# Altium PCB main.PcbDoc
Units mil, origin at the board's own origin, x right, y up, seen from the top; angles counter-clockwise.
Board outline 6000 x 4000 mil, 2 copper layers (Top Layer, Bottom Layer); 101 components, 100 nets, 369 pads, 32 vias.
Unrouted connection lines stored in the file: 248.
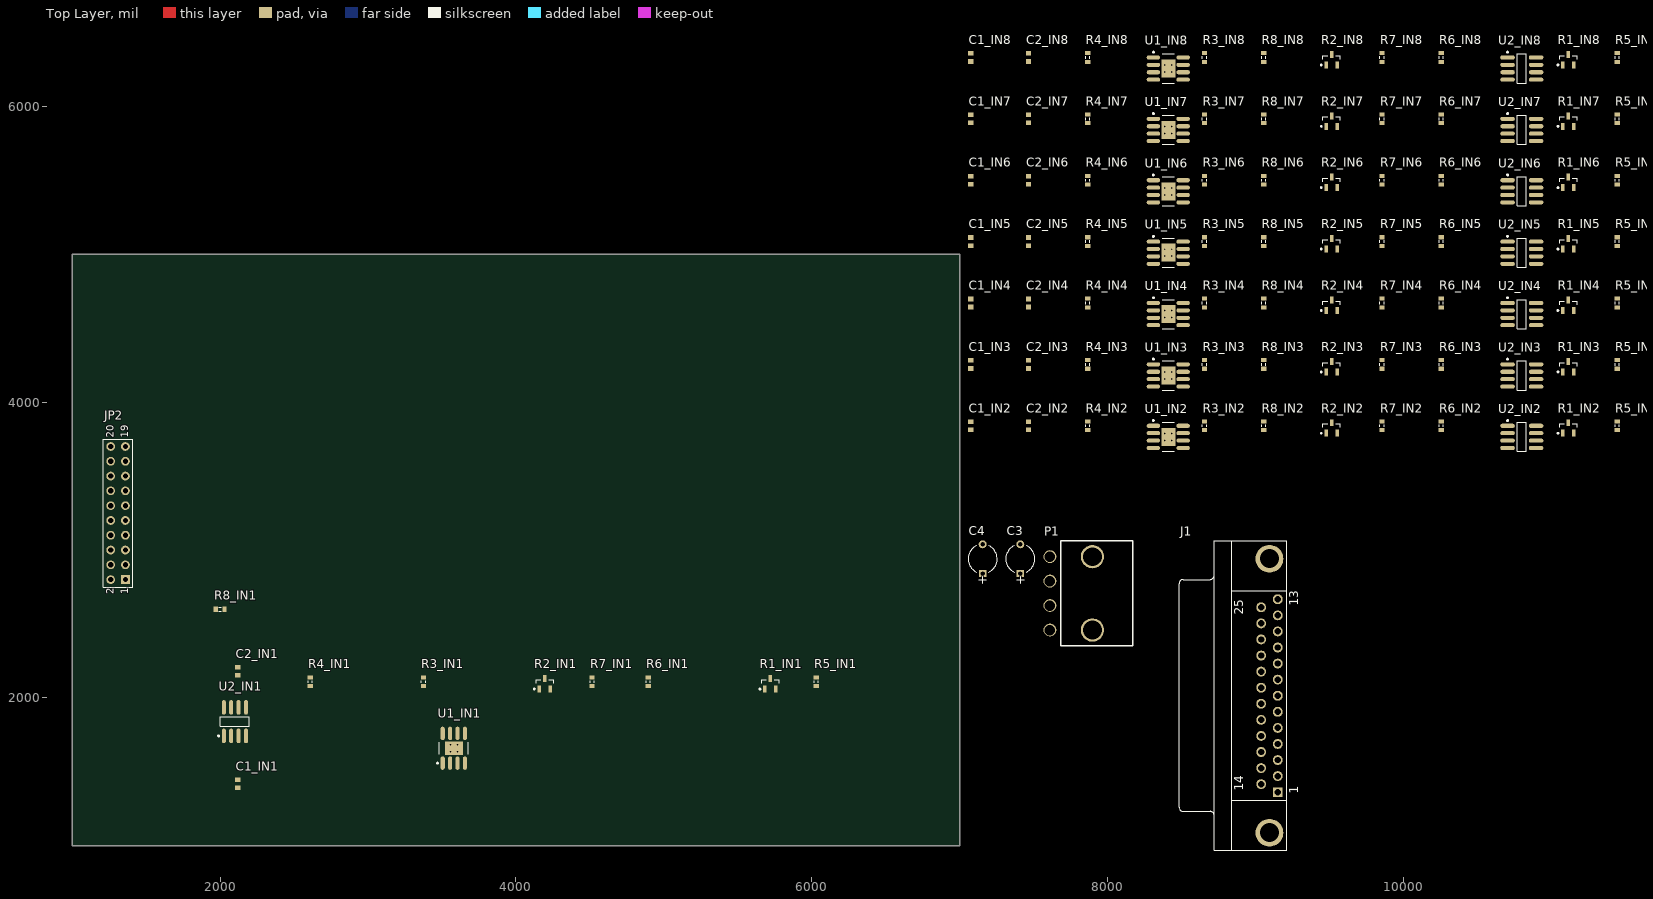
[diagram p0: Top Layer view]
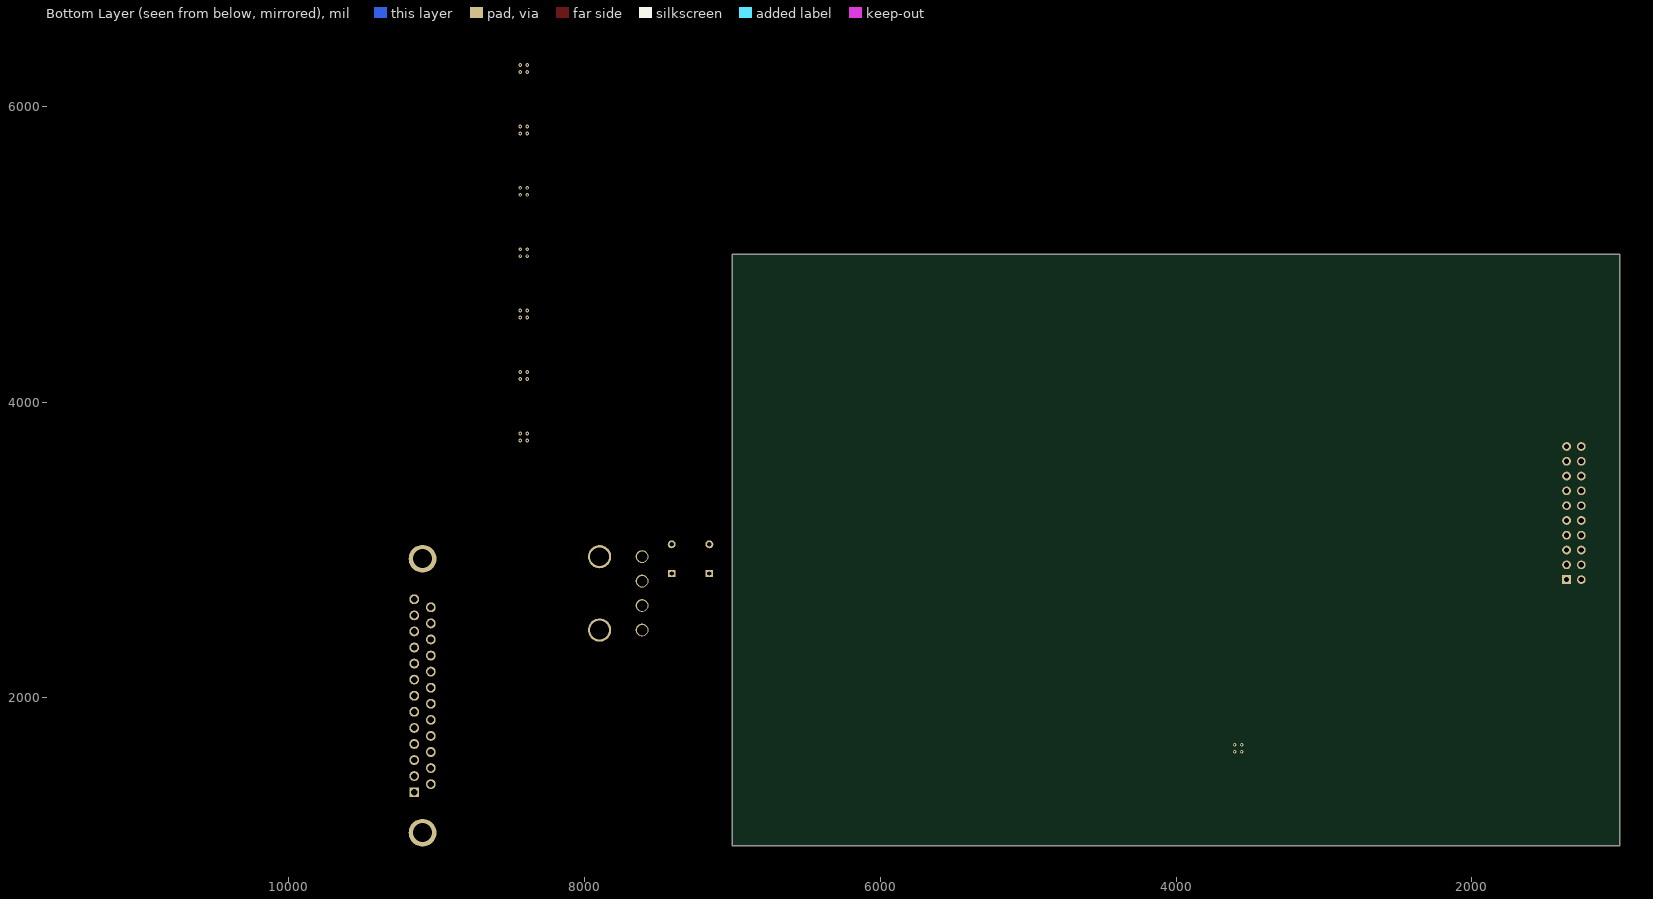
[diagram p1: Bottom Layer view, seen from below]

## Layer stack, top to bottom
Top Layer: signal copper 1.4
Dielectric: dielectric 12.6, FR-4, Dk 4.8
Bottom Layer: signal copper 1.4

## Board outline
1000,1000 7000,1000 7000,5000 1000,5000

## Design rules (kind name [scope] priority, off if disabled: settings)
Clearance [All] p1: gap=10
PolygonConnect [All] p1: connectstyle=Relief reliefconductorwidth=10 reliefentries=4 polygonreliefangle="90 Angle"
RoomDefinition main [InComponentClass('main')] p1: confinementstyle=ConfineIn formatcopy=TRUE lockcomponents=FALSE outline 7045,960 9305,960 9305,3175 7045,3175
RoomDefinition IN8 [InComponentClass('IN8')] p2: confinementstyle=ConfineIn formatcopy=TRUE lockcomponents=FALSE outline 7045,6125 11780,6125 11780,6495 7045,6495
RoomDefinition IN7 [InComponentClass('IN7')] p3: confinementstyle=ConfineIn formatcopy=TRUE lockcomponents=FALSE outline 7045,5710 11780,5710 11780,6080 7045,6080
RoomDefinition IN6 [InComponentClass('IN6')] p4: confinementstyle=ConfineIn formatcopy=TRUE lockcomponents=FALSE outline 7045,5295 11780,5295 11780,5665 7045,5665
RoomDefinition IN5 [InComponentClass('IN5')] p5: confinementstyle=ConfineIn formatcopy=TRUE lockcomponents=FALSE outline 7045,4880 11780,4880 11780,5250 7045,5250
RoomDefinition IN4 [InComponentClass('IN4')] p6: confinementstyle=ConfineIn formatcopy=TRUE lockcomponents=FALSE outline 7045,4465 11780,4465 11780,4835 7045,4835
RoomDefinition IN3 [InComponentClass('IN3')] p7: confinementstyle=ConfineIn formatcopy=TRUE lockcomponents=FALSE outline 7045,4050 11780,4050 11780,4420 7045,4420
RoomDefinition IN2 [InComponentClass('IN2')] p8: confinementstyle=ConfineIn formatcopy=TRUE lockcomponents=FALSE outline 7045,3635 11780,3635 11780,4005 7045,4005
RoomDefinition IN1 [InComponentClass('IN1')] p9: confinementstyle=ConfineIn formatcopy=TRUE lockcomponents=FALSE outline 1830,1540 6345,1540 6345,2275 1830,2275
RoutingVias [All] p1: holewidth=28 width=50 viastyle="Through Hole" minholewidth=28 minwidth=50 maxholewidth=28 maxwidth=50
SilkscreenOverComponentPads [All] p1: minsilkscreentomaskgap=10
SolderMaskExpansion [All] p1: expansion=4
Width [All] p1: maxlimit=10 minlimit=10 preferedwidth=10
27 further rules are at their usual default settings.

## Classes and differential pairs
channel class diff_amp: IN1 IN2 IN3 IN4 IN5 IN6 IN7 IN8
net class OUT-[1..8]: OUT-1 OUT-2 OUT-3 OUT-4 OUT-5 OUT-6 OUT-7 OUT-8
net class OUT+[1..8]: OUT+1 OUT+2 OUT+3 OUT+4 OUT+5 OUT+6 OUT+7 OUT+8
net class IN-[1..8]: IN-1 IN-2 IN-3 IN-4 IN-5 IN-6 IN-7 IN-8
net class IN+[1..8]: IN+1 IN+2 IN+3 IN+4 IN+5 IN+6 IN+7 IN+8
component class main: C3 C4 J1 JP2 P1
component class IN8: C1_IN8 C2_IN8 R1_IN8 R2_IN8 R3_IN8 R4_IN8 R5_IN8 R6_IN8 R7_IN8 R8_IN8 U1_IN8 U2_IN8
component class IN7: C1_IN7 C2_IN7 R1_IN7 R2_IN7 R3_IN7 R4_IN7 R5_IN7 R6_IN7 R7_IN7 R8_IN7 U1_IN7 U2_IN7
component class IN6: C1_IN6 C2_IN6 R1_IN6 R2_IN6 R3_IN6 R4_IN6 R5_IN6 R6_IN6 R7_IN6 R8_IN6 U1_IN6 U2_IN6
component class IN5: C1_IN5 C2_IN5 R1_IN5 R2_IN5 R3_IN5 R4_IN5 R5_IN5 R6_IN5 R7_IN5 R8_IN5 U1_IN5 U2_IN5
component class IN4: C1_IN4 C2_IN4 R1_IN4 R2_IN4 R3_IN4 R4_IN4 R5_IN4 R6_IN4 R7_IN4 R8_IN4 U1_IN4 U2_IN4
component class IN3: C1_IN3 C2_IN3 R1_IN3 R2_IN3 R3_IN3 R4_IN3 R5_IN3 R6_IN3 R7_IN3 R8_IN3 U1_IN3 U2_IN3
component class IN2: C1_IN2 C2_IN2 R1_IN2 R2_IN2 R3_IN2 R4_IN2 R5_IN2 R6_IN2 R7_IN2 R8_IN2 U1_IN2 U2_IN2
component class IN1: C1_IN1 C2_IN1 R1_IN1 R2_IN1 R3_IN1 R4_IN1 R5_IN1 R6_IN1 R7_IN1 R8_IN1 U1_IN1 U2_IN1

## Components (designator, comment, footprint, x,y, rotation, side; value= is the part's Value field where it differs from the comment)
C1_IN1 "Cap Semi" CAPC1608L 2120,1420 r90 top (schematic designator C1)
C1_IN2 "Cap Semi" CAPC1608L 7075,3840 r90 top (schematic designator C1)
C1_IN3 "Cap Semi" CAPC1608L 7075,4255 r90 top (schematic designator C1)
C1_IN4 "Cap Semi" CAPC1608L 7075,4670 r90 top (schematic designator C1)
C1_IN5 "Cap Semi" CAPC1608L 7075,5085 r90 top (schematic designator C1)
C1_IN6 "Cap Semi" CAPC1608L 7075,5500 r90 top (schematic designator C1)
C1_IN7 "Cap Semi" CAPC1608L 7075,5915 r90 top (schematic designator C1)
C1_IN8 "Cap Semi" CAPC1608L 7075,6330 r90 top (schematic designator C1)
C2_IN1 "Cap Semi" CAPC1608L 2120,2180 r90 top (schematic designator C2)
C2_IN2 "Cap Semi" CAPC1608L 7465,3840 r90 top (schematic designator C2)
C2_IN3 "Cap Semi" CAPC1608L 7465,4255 r90 top (schematic designator C2)
C2_IN4 "Cap Semi" CAPC1608L 7465,4670 r90 top (schematic designator C2)
C2_IN5 "Cap Semi" CAPC1608L 7465,5085 r90 top (schematic designator C2)
C2_IN6 "Cap Semi" CAPC1608L 7465,5500 r90 top (schematic designator C2)
C2_IN7 "Cap Semi" CAPC1608L 7465,5915 r90 top (schematic designator C2)
C2_IN8 "Cap Semi" CAPC1608L 7465,6330 r90 top (schematic designator C2)
C3 "Cap Pol1" CAPPR5-5x5 7410,2940 r90 top
C4 "Cap Pol1" CAPPR5-5x5 7155,2940 r90 top
J1 "D Connector 25" DSUB1.385-2H25A 8720,2015 r90 top
JP2 "Header 10X2H" HDR2X10 1360,2800 r90 top
P1 "39-30-3045" MJ4RTHR 7610,2790 r90 top
R1_IN1 "1k / 10k" SOT23-3L 5720,2095 r90 top (schematic designator R1)
R1_IN2 "1k / 10k" SOT23-3L 11115,3825 r90 top (schematic designator R1)
R1_IN3 "1k / 10k" SOT23-3L 11115,4240 r90 top (schematic designator R1)
R1_IN4 "1k / 10k" SOT23-3L 11115,4655 r90 top (schematic designator R1)
R1_IN5 "1k / 10k" SOT23-3L 11115,5070 r90 top (schematic designator R1)
R1_IN6 "1k / 10k" SOT23-3L 11115,5485 r90 top (schematic designator R1)
R1_IN7 "1k / 10k" SOT23-3L 11115,5900 r90 top (schematic designator R1)
R1_IN8 "1k / 10k" SOT23-3L 11115,6315 r90 top (schematic designator R1)
R2_IN1 "1k / 10k" SOT23-3L 4195,2095 r90 top (schematic designator R2)
R2_IN2 "1k / 10k" SOT23-3L 9515,3825 r90 top (schematic designator R2)
R2_IN3 "1k / 10k" SOT23-3L 9515,4240 r90 top (schematic designator R2)
R2_IN4 "1k / 10k" SOT23-3L 9515,4655 r90 top (schematic designator R2)
R2_IN5 "1k / 10k" SOT23-3L 9515,5070 r90 top (schematic designator R2)
R2_IN6 "1k / 10k" SOT23-3L 9515,5485 r90 top (schematic designator R2)
R2_IN7 "1k / 10k" SOT23-3L 9515,5900 r90 top (schematic designator R2)
R2_IN8 "1k / 10k" SOT23-3L 9515,6315 r90 top (schematic designator R2)
R3_IN1 "Res Semi" RESC1608L 3375,2110 r90 top (schematic designator R3)
R3_IN2 "Res Semi" RESC1608L 8655,3840 r90 top (schematic designator R3)
R3_IN3 "Res Semi" RESC1608L 8655,4255 r90 top (schematic designator R3)
R3_IN4 "Res Semi" RESC1608L 8655,4670 r90 top (schematic designator R3)
R3_IN5 "Res Semi" RESC1608L 8655,5085 r90 top (schematic designator R3)
R3_IN6 "Res Semi" RESC1608L 8655,5500 r90 top (schematic designator R3)
R3_IN7 "Res Semi" RESC1608L 8655,5915 r90 top (schematic designator R3)
R3_IN8 "Res Semi" RESC1608L 8655,6330 r90 top (schematic designator R3)
R4_IN1 "Res Semi" RESC1608L 2610,2110 r90 top (schematic designator R4)
R4_IN2 "Res Semi" RESC1608L 7865,3840 r90 top (schematic designator R4)
R4_IN3 "Res Semi" RESC1608L 7865,4255 r90 top (schematic designator R4)
R4_IN4 "Res Semi" RESC1608L 7865,4670 r90 top (schematic designator R4)
R4_IN5 "Res Semi" RESC1608L 7865,5085 r90 top (schematic designator R4)
R4_IN6 "Res Semi" RESC1608L 7865,5500 r90 top (schematic designator R4)
R4_IN7 "Res Semi" RESC1608L 7865,5915 r90 top (schematic designator R4)
R4_IN8 "Res Semi" RESC1608L 7865,6330 r90 top (schematic designator R4)
R5_IN1 "Res Semi" RESC1608L 6030,2110 r90 top (schematic designator R5)
R5_IN2 "Res Semi" RESC1608L 11445,3840 r90 top (schematic designator R5)
R5_IN3 "Res Semi" RESC1608L 11445,4255 r90 top (schematic designator R5)
R5_IN4 "Res Semi" RESC1608L 11445,4670 r90 top (schematic designator R5)
R5_IN5 "Res Semi" RESC1608L 11445,5085 r90 top (schematic designator R5)
R5_IN6 "Res Semi" RESC1608L 11445,5500 r90 top (schematic designator R5)
R5_IN7 "Res Semi" RESC1608L 11445,5915 r90 top (schematic designator R5)
R5_IN8 "Res Semi" RESC1608L 11445,6330 r90 top (schematic designator R5)
R6_IN1 "Res Semi" RESC1608L 4895,2110 r90 top (schematic designator R6)
R6_IN2 "Res Semi" RESC1608L 10255,3840 r90 top (schematic designator R6)
R6_IN3 "Res Semi" RESC1608L 10255,4255 r90 top (schematic designator R6)
R6_IN4 "Res Semi" RESC1608L 10255,4670 r90 top (schematic designator R6)
R6_IN5 "Res Semi" RESC1608L 10255,5085 r90 top (schematic designator R6)
R6_IN6 "Res Semi" RESC1608L 10255,5500 r90 top (schematic designator R6)
R6_IN7 "Res Semi" RESC1608L 10255,5915 r90 top (schematic designator R6)
R6_IN8 "Res Semi" RESC1608L 10255,6330 r90 top (schematic designator R6)
R7_IN1 "Res Semi" RESC1608L 4515,2110 r90 top (schematic designator R7)
R7_IN2 "Res Semi" RESC1608L 9855,3840 r90 top (schematic designator R7)
R7_IN3 "Res Semi" RESC1608L 9855,4255 r90 top (schematic designator R7)
R7_IN4 "Res Semi" RESC1608L 9855,4670 r90 top (schematic designator R7)
R7_IN5 "Res Semi" RESC1608L 9855,5085 r90 top (schematic designator R7)
R7_IN6 "Res Semi" RESC1608L 9855,5500 r90 top (schematic designator R7)
R7_IN7 "Res Semi" RESC1608L 9855,5915 r90 top (schematic designator R7)
R7_IN8 "Res Semi" RESC1608L 9855,6330 r90 top (schematic designator R7)
R8_IN1 "Res Semi" RESC1608L 2000,2600 r180 top (schematic designator R8)
R8_IN2 "Res Semi" RESC1608L 9055,3840 r90 top (schematic designator R8)
R8_IN3 "Res Semi" RESC1608L 9055,4255 r90 top (schematic designator R8)
R8_IN4 "Res Semi" RESC1608L 9055,4670 r90 top (schematic designator R8)
R8_IN5 "Res Semi" RESC1608L 9055,5085 r90 top (schematic designator R8)
R8_IN6 "Res Semi" RESC1608L 9055,5500 r90 top (schematic designator R8)
R8_IN7 "Res Semi" RESC1608L 9055,5915 r90 top (schematic designator R8)
R8_IN8 "Res Semi" RESC1608L 9055,6330 r90 top (schematic designator R8)
U1_IN1 "LME49724MR" MRA08B_M 3580,1660 r90 top (schematic designator U1)
U1_IN2 "LME49724MR" MRA08B_M 8410,3765 r0 top (schematic designator U1)
U1_IN3 "LME49724MR" MRA08B_M 8410,4180 r0 top (schematic designator U1)
U1_IN4 "LME49724MR" MRA08B_M 8410,4595 r0 top (schematic designator U1)
U1_IN5 "LME49724MR" MRA08B_M 8410,5010 r0 top (schematic designator U1)
U1_IN6 "LME49724MR" MRA08B_M 8410,5425 r0 top (schematic designator U1)
U1_IN7 "LME49724MR" MRA08B_M 8410,5840 r0 top (schematic designator U1)
U1_IN8 "LME49724MR" MRA08B_M 8410,6255 r0 top (schematic designator U1)
U2_IN1 "OP284ES" SO-8_M 2100,1840 r90 top (schematic designator U2)
U2_IN2 "OP284ES" SO-8_M 10800,3765 r0 top (schematic designator U2)
U2_IN3 "OP284ES" SO-8_M 10800,4180 r0 top (schematic designator U2)
U2_IN4 "OP284ES" SO-8_M 10800,4595 r0 top (schematic designator U2)
U2_IN5 "OP284ES" SO-8_M 10800,5010 r0 top (schematic designator U2)
U2_IN6 "OP284ES" SO-8_M 10800,5425 r0 top (schematic designator U2)
U2_IN7 "OP284ES" SO-8_M 10800,5840 r0 top (schematic designator U2)
U2_IN8 "OP284ES" SO-8_M 10800,6255 r0 top (schematic designator U2)

## Footprints (in the part's own frame and the unit in brackets; to place one, negate y for a bottom-side part, rotate by r counter-clockwise, add the part's x,y. Pads: shape width x height; smd on the part's side, far side on the other; paste and mask are expansions set on the pad)
CAPC1608L [mm] "Chip Capacitor, Body 1.6x0.8mm, IPC High Density"
  rect 0.8x0.9 smd: 1(-0.7,0) 2(0.7,0)
  body extent -0.87,-0.48 0.87,0.48, height 1.3
CAPPR5-5x5 [mm] "Capacitor, Electrolytic, Radial; Body 5 x 5 mm (Dia.xH typ); Pin Spacing 5 mm (typ)"
  rect 1.25x1.25 hole 0.75: 1(-2.5,0)
  round 1.35 hole 0.8: 2(2.5,0)
  silkscreen extent -2.26,-2.5 2.27,2.5
DSUB1.385-2H25A [mm] "Connector; D Subminiature; 25 Position; Right Angle; Pitch 1.385 mm"
  rect 1.69x1.69 hole 1.09: 1(-16.566,-10.92)
  round 1.69 hole 1.09: 2(-13.805,-10.92) 3(-11.044,-10.92) 4(-8.283,-10.92) 5(-5.522,-10.92) 6(-2.761,-10.92) 7(0,-10.92) 8(2.761,-10.92) 9(5.522,-10.92) 10(8.283,-10.92) 11(11.044,-10.92) 12(13.805,-10.92) 13(16.566,-10.92) 14(-15.185,-8.08) 15(-12.424,-8.08) 16(-9.663,-8.08) 17(-6.902,-8.08) 18(-4.141,-8.08) 19(-1.38,-8.08) 20(1.381,-8.08) 21(4.142,-8.08) 22(6.903,-8.08) 23(9.664,-8.08) 24(12.425,-8.08) 25(15.186,-8.08)
  round 4.76 hole 3.26: 26(-23.526,-9.5) 27(23.526,-9.5)
  silkscreen extent -26.5,-12.5 26.6,6
HDR2X10 [mm] "Connector; Header; 10x2 Position"
  rect 1.5x1.5 hole 0.9: 1(0,0)
  round 1.5 hole 0.9: 2(0,2.54) 3(2.54,0) 4(2.54,2.54) 5(5.08,0) 6(5.08,2.54) 7(7.62,0) 8(7.62,2.54) 9(10.16,0) 10(10.16,2.54) 11(12.7,0) 12(12.7,2.54) 13(15.24,0) 14(15.24,2.54) 15(17.78,0) 16(17.78,2.54) 17(20.32,0) 18(20.32,2.54) 19(22.86,0) 20(22.86,2.54)
  silkscreen extent -1.27,-1.27 24.13,3.81
MJ4RTHR [mm]
  round 4 hole 3.2: 0(-8.4,-7.3) 0(4.2,-7.3)
  round 2.2 hole 1.8: 1(4.2,0) 2(0,0) 3(-4.2,0) 4(-8.4,0)
  silkscreen extent -11.1,-14.2 6.9,-1.9
MRA08B_M [mm] "SOIC, 8-Leads, Body 4.9x3.9mm, Pitch 1.27mm, Exposed Pad, IPC Low Density"
  oval 2.3x0.7 smd: 1(-2.55,1.905) 2(-2.55,0.635) 3(-2.55,-0.635) 4(-2.55,-1.905) 5(2.55,-1.905) 6(2.55,-0.635) 7(2.55,0.635) 8(2.55,1.905)
  rect 2.4x3.1 smd: 9(0,0)
  silkscreen extent -2.67,-2.5 1,2.93, body extent -2,-2.5 2,2.5, height 1.68
RESC1608L [mm] "Chip Resistor, Body 1.6x0.8mm, IPC High Density"
  rect 0.7x0.9 smd: 1(-0.75,0) 2(0.75,0)
  silkscreen extent -0.2,-0.35 0.2,0.35, body extent -0.85,-0.48 0.85,0.48, height 0.9
SO-8_M [mm] "SOIC, 8-Leads, Body 4.9x3.9mm, Pitch 1.27mm, IPC Low Density"
  oval 2.5x0.7 smd: 1(-2.45,1.905) 2(-2.45,0.635) 3(-2.45,-0.635) 4(-2.45,-1.905) 5(2.45,-1.905) 6(2.45,-0.635) 7(2.45,0.635) 8(2.45,1.905)
  silkscreen extent -2.57,-2.5 0.8,2.93, body extent -2,-2.5 2,2.5, height 1.75
SOT23-3L [mm] "SOT23, 3-Leads, Body 2.9x1.3mm, Pitch 0.95mm, Lead Span 2.5mm, IPC High Density"
  rect 1.2x0.6 smd: 1(-0.9,0.95) 2(-0.9,-0.95) 3(0.9,0)
  silkscreen extent -1.02,-1.5 0.7,1.92, body extent -0.7,-1.5 0.7,1.5, height 1.1

## Part data
C1_IN1 C1_IN2 C1_IN3 C1_IN4 C1_IN5 C1_IN6 C1_IN7 C1_IN8 C2_IN1 C2_IN2 C2_IN3 C2_IN4 C2_IN5 C2_IN6 C2_IN7 C2_IN8: "Capacitor (Semiconductor SIM Model)"
C3 C4: "Polarized Capacitor (Radial)"
J1: "Receptacle Assembly, 25 Position, Right Angle"
JP2: "Header, 10-Pin, Dual row, Right Angle"
P1: library part "Header 4", "Header, 4-Pin"
R1_IN1 R1_IN2 R1_IN3 R1_IN4 R1_IN5 R1_IN6 R1_IN7 R1_IN8 R2_IN1 R2_IN2 R2_IN3 R2_IN4 R2_IN5 R2_IN6 R2_IN7 R2_IN8: library part resistor_divider, "Precision Resistor Divider"
R3_IN1 R3_IN2 R3_IN3 R3_IN4 R3_IN5 R3_IN6 R3_IN7 R3_IN8 R4_IN1 R4_IN2 R4_IN3 R4_IN4 R4_IN5 R4_IN6 R4_IN7 R4_IN8 R5_IN1 R5_IN2 R5_IN3 R5_IN4 R5_IN5 R5_IN6 R5_IN7 R5_IN8 R6_IN1 R6_IN2 R6_IN3 R6_IN4 R6_IN5 R6_IN6 R6_IN7 R6_IN8 R7_IN1 R7_IN2 R7_IN3 R7_IN4 R7_IN5 R7_IN6 R7_IN7 R7_IN8 R8_IN1 R8_IN2 R8_IN3 R8_IN4 R8_IN5 R8_IN6 R8_IN7 R8_IN8: "Semiconductor Resistor"
U1_IN1 U1_IN2 U1_IN3 U1_IN4 U1_IN5 U1_IN6 U1_IN7 U1_IN8: "High Performance, High Fidelity, Fully-Differential Audio Operational Amplifier"
U2_IN1 U2_IN2 U2_IN3 U2_IN4 U2_IN5 U2_IN6 U2_IN7 U2_IN8: "Precision Rail-to-Rail Input and Output Operational Amplifier"

## Via types
v1: diameter 25.98, hole 12.99, Top Layer to Bottom Layer, tented top, 32 vias

## Nets (pads, with @x,y where several pads share a name; then routed paths per layer and width w, separated by ;. In a path a pad name is that pad's centre, name@x,y a point inside that pad or via, vN(x,y) a via of type N, cw(c..) or ccw(c..) an arc to the next point about the centre after c; other vN are vias at no path point)
AGND: JP2.1 JP2.2 JP2.19 JP2.20
GND: C1_IN1.1 C1_IN2.1 C1_IN3.1 C1_IN4.1 C1_IN5.1 C1_IN6.1 C1_IN7.1 C1_IN8.1 C2_IN1.1 C2_IN2.1 C2_IN3.1 C2_IN4.1 C2_IN5.1 C2_IN6.1 C2_IN7.1 C2_IN8.1 C3.2 C4.1 J1.2 J1.5 J1.8 J1.11 J1.16 J1.19 J1.22 J1.25 P1.2 P1.3 U1_IN1.2 U1_IN1.7 U1_IN2.2 U1_IN2.7 U1_IN3.2 U1_IN3.7 U1_IN4.2 U1_IN4.7 U1_IN5.2 U1_IN5.7 U1_IN6.2 U1_IN6.7 U1_IN7.2 U1_IN7.7 U1_IN8.2 U1_IN8.7 U2_IN1.3 U2_IN1.5 U2_IN2.3 U2_IN2.5 U2_IN3.3 U2_IN3.5 U2_IN4.3 U2_IN4.5 U2_IN5.3 U2_IN5.5 U2_IN6.3 U2_IN6.5 U2_IN7.3 U2_IN7.5 U2_IN8.3 U2_IN8.5
IN+1: JP2.4 R6_IN1.1
IN+2: JP2.6 R6_IN2.1
IN+3: JP2.8 R6_IN3.1
IN+4: JP2.10 R6_IN4.1
IN+5: JP2.12 R6_IN5.1
IN+6: JP2.14 R6_IN6.1
IN+7: JP2.16 R6_IN7.1
IN+8: JP2.18 R6_IN8.1
IN-1: JP2.3 R8_IN1.1
IN-2: JP2.5 R8_IN2.1
IN-3: JP2.7 R8_IN3.1
IN-4: JP2.9 R8_IN4.1
IN-5: JP2.11 R8_IN5.1
IN-6: JP2.13 R8_IN6.1
IN-7: JP2.15 R8_IN7.1
IN-8: JP2.17 R8_IN8.1
NetR1_IN1_0: R1_IN1.1 R5_IN1.2 U2_IN1.1
NetR1_IN1_1: R1_IN1.2 R3_IN1.1 U1_IN1.4
NetR1_IN1_2: R1_IN1.3 U1_IN1.8
NetR1_IN2_0: R1_IN2.1 R5_IN2.2 U2_IN2.1
NetR1_IN2_1: R1_IN2.2 R3_IN2.1 U1_IN2.4
NetR1_IN2_2: R1_IN2.3 U1_IN2.8
NetR1_IN3_0: R1_IN3.1 R5_IN3.2 U2_IN3.1
NetR1_IN3_1: R1_IN3.2 R3_IN3.1 U1_IN3.4
NetR1_IN3_2: R1_IN3.3 U1_IN3.8
NetR1_IN4_0: R1_IN4.1 R5_IN4.2 U2_IN4.1
NetR1_IN4_1: R1_IN4.2 R3_IN4.1 U1_IN4.4
NetR1_IN4_2: R1_IN4.3 U1_IN4.8
NetR1_IN5_0: R1_IN5.1 R5_IN5.2 U2_IN5.1
NetR1_IN5_1: R1_IN5.2 R3_IN5.1 U1_IN5.4
NetR1_IN5_2: R1_IN5.3 U1_IN5.8
NetR1_IN6_0: R1_IN6.1 R5_IN6.2 U2_IN6.1
NetR1_IN6_1: R1_IN6.2 R3_IN6.1 U1_IN6.4
NetR1_IN6_2: R1_IN6.3 U1_IN6.8
NetR1_IN7_0: R1_IN7.1 R5_IN7.2 U2_IN7.1
NetR1_IN7_1: R1_IN7.2 R3_IN7.1 U1_IN7.4
NetR1_IN7_2: R1_IN7.3 U1_IN7.8
NetR1_IN8_0: R1_IN8.1 R5_IN8.2 U2_IN8.1
NetR1_IN8_1: R1_IN8.2 R3_IN8.1 U1_IN8.4
NetR1_IN8_2: R1_IN8.3 U1_IN8.8
NetR2_IN1_0: R2_IN1.1 U2_IN1.7
NetR2_IN1_1: R2_IN1.2 R4_IN1.1 U1_IN1.5
NetR2_IN1_2: R2_IN1.3 U1_IN1.1
NetR2_IN2_0: R2_IN2.1 U2_IN2.7
NetR2_IN2_1: R2_IN2.2 R4_IN2.1 U1_IN2.5
NetR2_IN2_2: R2_IN2.3 U1_IN2.1
NetR2_IN3_0: R2_IN3.1 U2_IN3.7
NetR2_IN3_1: R2_IN3.2 R4_IN3.1 U1_IN3.5
NetR2_IN3_2: R2_IN3.3 U1_IN3.1
NetR2_IN4_0: R2_IN4.1 U2_IN4.7
NetR2_IN4_1: R2_IN4.2 R4_IN4.1 U1_IN4.5
NetR2_IN4_2: R2_IN4.3 U1_IN4.1
NetR2_IN5_0: R2_IN5.1 U2_IN5.7
NetR2_IN5_1: R2_IN5.2 R4_IN5.1 U1_IN5.5
NetR2_IN5_2: R2_IN5.3 U1_IN5.1
NetR2_IN6_0: R2_IN6.1 U2_IN6.7
NetR2_IN6_1: R2_IN6.2 R4_IN6.1 U1_IN6.5
NetR2_IN6_2: R2_IN6.3 U1_IN6.1
NetR2_IN7_0: R2_IN7.1 U2_IN7.7
NetR2_IN7_1: R2_IN7.2 R4_IN7.1 U1_IN7.5
NetR2_IN7_2: R2_IN7.3 U1_IN7.1
NetR2_IN8_0: R2_IN8.1 U2_IN8.7
NetR2_IN8_1: R2_IN8.2 R4_IN8.1 U1_IN8.5
NetR2_IN8_2: R2_IN8.3 U1_IN8.1
NetR5_IN1_1: R5_IN1.1 R6_IN1.2 U2_IN1.2
NetR5_IN2_1: R5_IN2.1 R6_IN2.2 U2_IN2.2
NetR5_IN3_1: R5_IN3.1 R6_IN3.2 U2_IN3.2
NetR5_IN4_1: R5_IN4.1 R6_IN4.2 U2_IN4.2
NetR5_IN5_1: R5_IN5.1 R6_IN5.2 U2_IN5.2
NetR5_IN6_1: R5_IN6.1 R6_IN6.2 U2_IN6.2
NetR5_IN7_1: R5_IN7.1 R6_IN7.2 U2_IN7.2
NetR5_IN8_1: R5_IN8.1 R6_IN8.2 U2_IN8.2
NetR7_IN1_1: R7_IN1.1 R8_IN1.2 U2_IN1.6
NetR7_IN2_1: R7_IN2.1 R8_IN2.2 U2_IN2.6
NetR7_IN3_1: R7_IN3.1 R8_IN3.2 U2_IN3.6
NetR7_IN4_1: R7_IN4.1 R8_IN4.2 U2_IN4.6
NetR7_IN5_1: R7_IN5.1 R8_IN5.2 U2_IN5.6
NetR7_IN6_1: R7_IN6.1 R8_IN6.2 U2_IN6.6
NetR7_IN7_1: R7_IN7.1 R8_IN7.2 U2_IN7.6
NetR7_IN8_1: R7_IN8.1 R8_IN8.2 U2_IN8.6
OUT+1: J1.24 R3_IN1.2
OUT+2: J1.10 R3_IN2.2
OUT+3: J1.21 R3_IN3.2
OUT+4: J1.7 R3_IN4.2
OUT+5: J1.18 R3_IN5.2
OUT+6: J1.4 R3_IN6.2
OUT+7: J1.15 R3_IN7.2
OUT+8: J1.1 R3_IN8.2
OUT-1: J1.12 R4_IN1.2
OUT-2: J1.23 R4_IN2.2
OUT-3: J1.9 R4_IN3.2
OUT-4: J1.20 R4_IN4.2
OUT-5: J1.6 R4_IN5.2
OUT-6: J1.17 R4_IN6.2
OUT-7: J1.3 R4_IN7.2
OUT-8: J1.14 R4_IN8.2
VCC: C1_IN1.2 C1_IN2.2 C1_IN3.2 C1_IN4.2 C1_IN5.2 C1_IN6.2 C1_IN7.2 C1_IN8.2 C3.1 P1.4 U1_IN1.3 U1_IN2.3 U1_IN3.3 U1_IN4.3 U1_IN5.3 U1_IN6.3 U1_IN7.3 U1_IN8.3 U2_IN1.4 U2_IN1.8 U2_IN2.4 U2_IN2.8 U2_IN3.4 U2_IN3.8 U2_IN4.4 U2_IN4.8 U2_IN5.4 U2_IN5.8 U2_IN6.4 U2_IN6.8 U2_IN7.4 U2_IN7.8 U2_IN8.4 U2_IN8.8
VEE: C2_IN1.2 C2_IN2.2 C2_IN3.2 C2_IN4.2 C2_IN5.2 C2_IN6.2 C2_IN7.2 C2_IN8.2 C4.2 P1.1 U1_IN1.6 U1_IN2.6 U1_IN3.6 U1_IN4.6 U1_IN5.6 U1_IN6.6 U1_IN7.6 U1_IN8.6
pads on no net: J1.13 J1.26 J1.27 P1.0 R7_IN1.2 R7_IN2.2 R7_IN3.2 R7_IN4.2 R7_IN5.2 R7_IN6.2 R7_IN7.2 R7_IN8.2 U1_IN1.9 U1_IN2.9 U1_IN3.9 U1_IN4.9 U1_IN5.9 U1_IN6.9 U1_IN7.9 U1_IN8.9
copper on no net:
  other v1: 3556.38,1636.38 3603.62,1636.38 3556.38,1683.62 3603.62,1683.62 8386.38,3741.38 8433.62,3741.38 8386.38,3788.62 8433.62,3788.62 8386.38,4156.38 8433.62,4156.38 8386.38,4203.62 8433.62,4203.62 8386.38,4571.38 8433.62,4571.38 8386.38,4618.62 8433.62,4618.62 8386.38,4986.38 8433.62,4986.38 8386.38,5033.62 8433.62,5033.62 8386.38,5401.38 8433.62,5401.38 8386.38,5448.62 8433.62,5448.62 8386.38,5816.38 8433.62,5816.38 8386.38,5863.62 8433.62,5863.62 8386.38,6231.38 8433.62,6231.38 8386.38,6278.62 8433.62,6278.62

## Text inside footprints (layer, text, board x,y; h text height)
C3: Top Overlay "+" at 7439.53,2760.87 h59.06 r90
C4: Top Overlay "+" at 7184.53,2760.87 h59.06 r90
J1: Top Overlay "1" at 9289.88,1352.95 h59.06 r90; Top Overlay "13" at 9289.88,2622.91 h59.06 r90; Top Overlay "14" at 8915.87,1372.85 h59.06 r90; Top Overlay "25" at 8915.87,2563.64 h59.06 r90
JP2: Top Overlay "20" at 1280,3760 h50 r90; Top Overlay "19" at 1380,3760 h50 r90; Top Overlay "1" at 1380,2700 h50 r90; Top Overlay "2" at 1280,2700 h50 r90